# Altium PCB HAT PCB.PcbDoc
Units mm, origin at the board's own origin, x right, y up, seen from the top; angles counter-clockwise.
Board outline 100.25 x 60.26 mm, 2 copper layers (Top Layer, Bottom Layer); 17 components, 36 nets, 670 pads, 34 vias.
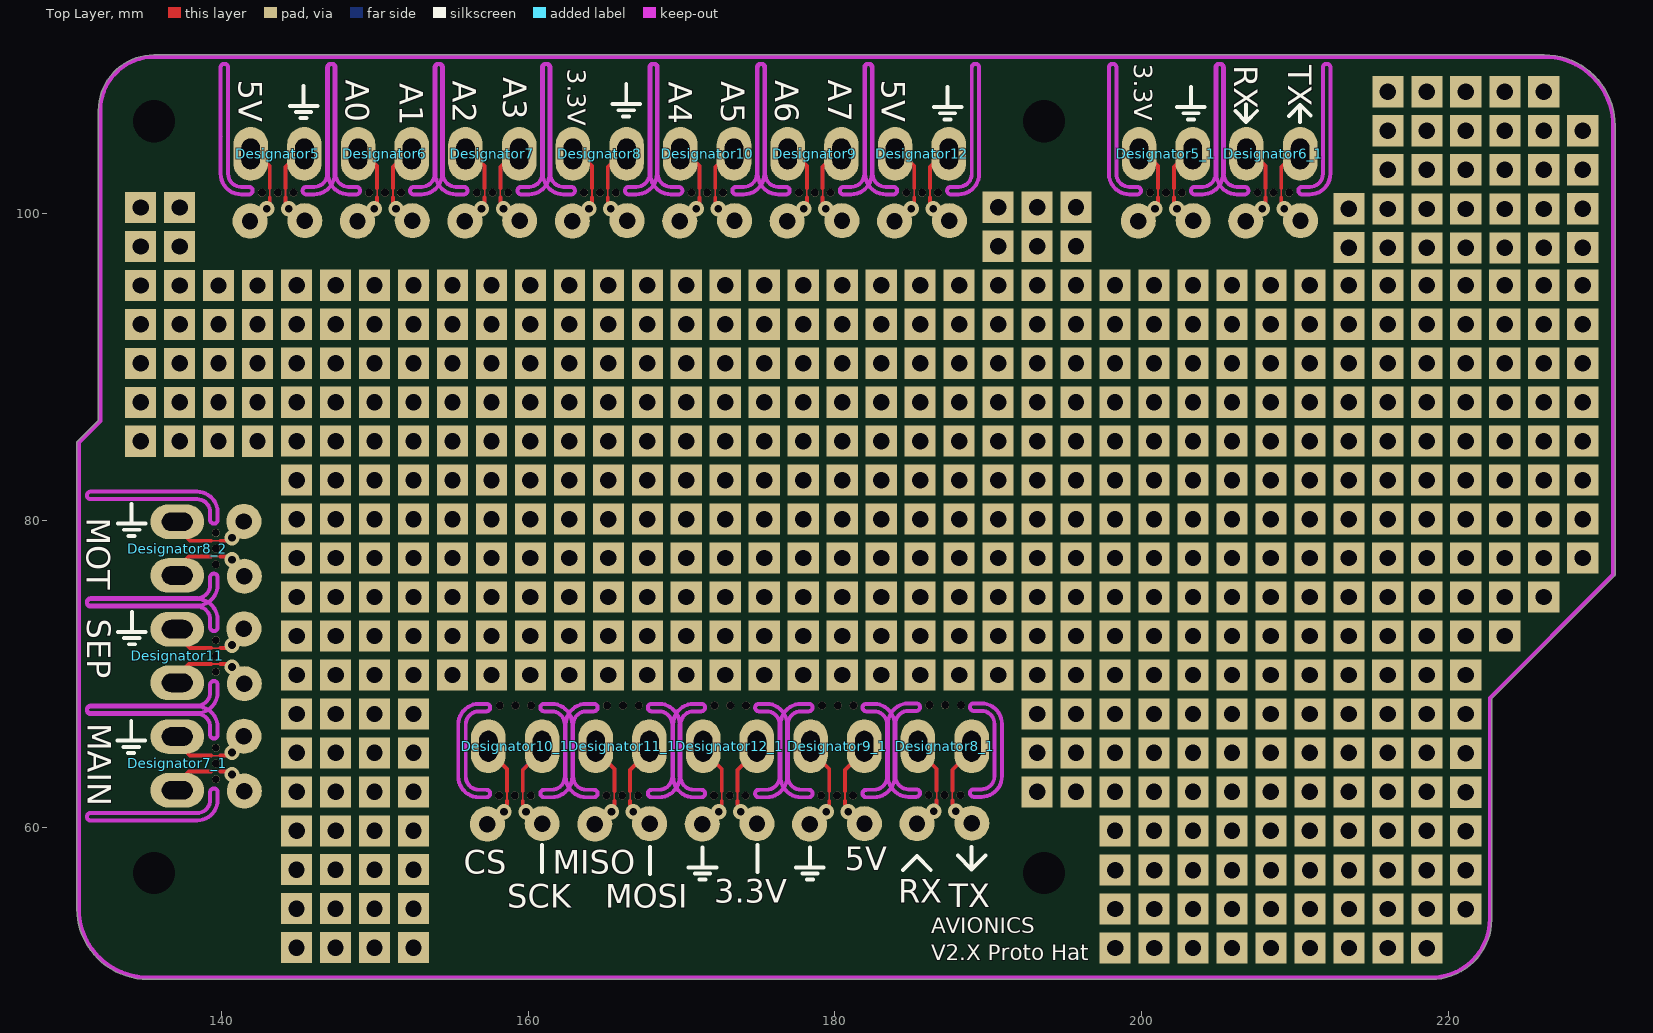
[diagram p0: Top Layer view]
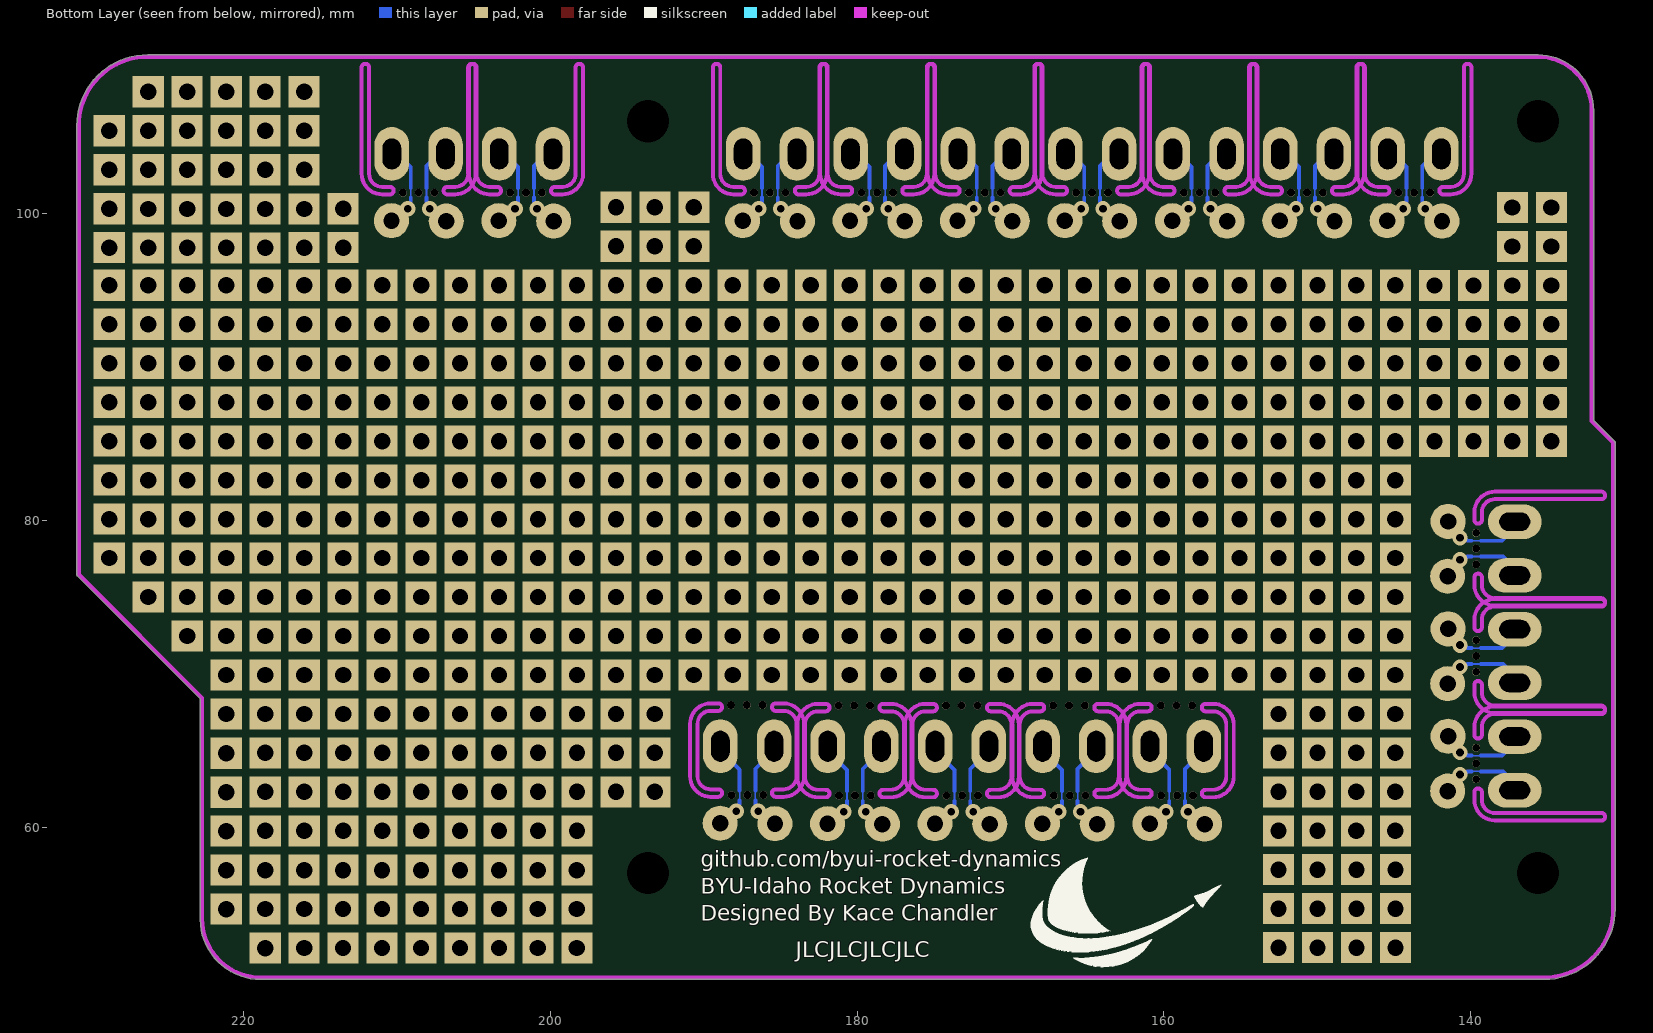
[diagram p1: Bottom Layer view, seen from below]

## Layer stack, top to bottom
Top Solder: solder mask 0.0102, Solder Resist, Dk 3.5
Top Layer: signal copper 0.0356
Dielectric 1: dielectric 0.32, FR-4, Dk 4.8
Bottom Layer: signal copper 0.0356
Bottom Solder: solder mask 0.0102, Solder Resist, Dk 3.5

## Board outline
135.216,50.08 ccw(c135.217,50.207) 135.217,50.08 218.813,50.08 ccw(c218.851,50.201) 218.851,50.074 ccw(c218.851,54.03) 222.806,53.968 ccw(c222.685,54.007) 222.812,54.007 222.812,68.384 230.805,76.377 230.804,76.376 ccw(c230.715,76.467) 230.842,76.467 230.842,105.683 ccw(c230.717,105.707) 230.844,105.707 ccw(c226.217,105.707) 226.217,110.335 ccw(c226.217,110.207) 226.21,110.334 135.618,110.335 135.617,110.335 cw(c135.617,110.207) 135.618,110.335 135.617,110.335 ccw(c135.617,106.707) 131.99,106.707 131.99,86.51 130.627,85.147 130.627,85.148 ccw(c130.717,85.057) 130.59,85.057 130.59,54.707 ccw(c130.717,54.707) 130.59,54.7 ccw(c135.217,54.707)
cut-out: 135.817,81.839
cut-out: 140.103,105.042

## Design rules (kind name [scope] priority, off if disabled: settings)
BoardOutlineClearance [All] p1: gap=0.2 ignorepadtopadclearanceinfootprint=FALSE except(0.4: Arc-SplitBarrior Arc-SplitContinuation Track-SplitBarrior Track-SplitContinuation SMDPad-SplitBarrior SMDPad-SplitContinuation THPad-SplitBarrior THPad-SplitContinuation Via-SplitBarrior Via-SplitContinuation Fill-SplitBarrior Fill-SplitContinuation Poly-SplitBarrior Poly-SplitContinuation Region-SplitBarrior Region-SplitContinuation Text-SplitBarrior Text-SplitContinuation)
Clearance "Clearance Bottom Layer" [OnLayer('Bottom Layer')] p1: gap=0.203 ignorepadtopadclearanceinfootprint=TRUE except(0.254: Arc-Text Track-Text SMDPad-Text THPad-Text Via-Text Fill-Text Poly-Text Region-Text Text-Text)
Clearance "Clearance Top Layer" [OnLayer('Top Layer')] p2: gap=0.203 ignorepadtopadclearanceinfootprint=TRUE except(0.254: Arc-Text Track-Text SMDPad-Text THPad-Text Via-Text Fill-Text Poly-Text Region-Text Text-Text)
Clearance [All] p3: gap=0.2 ignorepadtopadclearanceinfootprint=FALSE except(0.089: Arc-Arc Arc-Track Arc-SMDPad Track-Track Track-SMDPad SMDPad-SMDPad; 0.127: Arc-Via Track-Via SMDPad-Via THPad-Via Via-Via; 0.254: Arc-Text Track-Text SMDPad-Text THPad-Text Via-Text Fill-Text Poly-Text Region-Text Text-Text)
ComponentClearance [HasFootprint('Screw Terminal') vs HasFootprint('Screw Terminal')] p1: gap=0 collisioncheckmode=3 verticalgap=0 showdistances=FALSE
ComponentClearance ComponentClearance_2 [InComponent('No Component') And OnLayer('Top Layer')] p2: gap=0.254 collisioncheckmode=3 verticalgap=0.254 showdistances=FALSE
ComponentClearance ComponentClearance_1 [All] p3: gap=0.254 collisioncheckmode=3 verticalgap=0.254 showdistances=FALSE
HoleSize [All] p1: absolutevalues=TRUE maxlimit=6.3 minlimit=0.2 maxpercent=80.000 minpercent=20.000
MinimumAnnularRing [All] p1: minimumring=0.076
MinimumSolderMaskSliver [All] p1: minsoldermaskwidth=0.1
PolygonConnect PolygonConnect_1 [All] p1: thpad.connectstyle=Relief thpad.reliefconductorwidth=0.508 thpad.reliefentries=4 thpad.polygonreliefangle="90 Angle" thpad.airgapwidth=0.254 smdpad.connectstyle=Relief smdpad.reliefconductorwidth=0.508 smdpad.reliefentries=4 smdpad.polygonreliefangle="90 Angle" smdpad.airgapwidth=0.254 via.connectstyle=Direct via.reliefconductorwidth=0.508 via.reliefentries=4 via.polygonreliefangle="90 Angle" via.airgapwidth=0.254
RoutingCorners [All] p1: cornerstyle=Round minsetback=2.54 maxsetback=2.54
RoutingVias [All] p1: holewidth=0.5 width=1 viastyle="Through Hole" minholewidth=0.2 minwidth=0.45 maxholewidth=1 maxwidth=2
SilkToSilkClearance [All] p1: silktosilkclearance=0.1
SilkToSolderMaskClearance [IsPad] p1: minsilkscreentomaskgap=0.1 clearancetoexposedcopper=TRUE
SolderMaskExpansion [IsVia] p1: expansion=0 soldermaskfromhole=TRUE
Width [All] p1: maxlimit=10 minlimit=0.089 preferedwidth=0.381
24 further rules are at their usual default settings.

## Components (designator, comment, footprint, x,y, rotation, side; value= is the part's Value field where it differs from the comment)
Designator5 "Comment" "SCREW TERMINAL - DUPLICATE" 145.417,103.88 r90 top
Designator5_1 "Comment" "SCREW TERMINAL - DUPLICATE" 203.317,103.88 r90 top
Designator6 "Comment" "SCREW TERMINAL - DUPLICATE" 152.417,103.88 r90 top
Designator6_1 "Comment" "SCREW TERMINAL - DUPLICATE" 210.317,103.88 r90 top
Designator7 "Comment" "SCREW TERMINAL - DUPLICATE" 159.417,103.88 r90 top
Designator7_1 "Comment" "SCREW TERMINAL - DUPLICATE" 137.131,65.907 r180 top
Designator8 "Comment" "SCREW TERMINAL - DUPLICATE" 166.417,103.88 r90 top
Designator8_1 "Comment" "SCREW TERMINAL - DUPLICATE" 185.406,65.274 r270 top
Designator8_2 "Comment" "SCREW TERMINAL - DUPLICATE" 137.131,79.907 r180 top
Designator9 "Comment" "SCREW TERMINAL - DUPLICATE" 180.417,103.88 r90 top
Designator9_1 "Comment" "SCREW TERMINAL - DUPLICATE" 178.406,65.274 r270 top
Designator10 "Comment" "SCREW TERMINAL - DUPLICATE" 173.417,103.88 r90 top
Designator10_1 "Comment" "SCREW TERMINAL - DUPLICATE" 157.406,65.274 r270 top
Designator11 "Comment" "SCREW TERMINAL - DUPLICATE" 137.131,72.907 r180 top
Designator11_1 "Comment" "SCREW TERMINAL - DUPLICATE" 164.406,65.274 r270 top
Designator12 "Comment" "SCREW TERMINAL - DUPLICATE" 187.417,103.88 r90 top
Designator12_1 "Comment" "SCREW TERMINAL - DUPLICATE" 171.406,65.274 r270 top

## Footprints (in the part's own frame and the unit in brackets; to place one, negate y for a bottom-side part, rotate by r counter-clockwise, add the part's x,y. Pads: shape width x height; smd on the part's side, far side on the other; paste and mask are expansions set on the pad)
"SCREW TERMINAL - DUPLICATE" [mm] "Non-Polarized"
  oval 3.5x2.25 hole 1.2 slot 2 at 0 deg: 1(0,3.5) 2(0,0)
  body extent -1.35,2.55 1.3,4.45, height 7.01

## Free pads (board coordinates)
  round 0.508 hole 0.508 unplated: 0(139.646,63.124) 0(139.646,64.153) 0(139.646,65.181) 0(139.646,70.125) 0(139.646,71.154) 0(139.646,72.182) 0(139.646,77.126) 0(139.646,78.154) 0(139.646,79.183) 0(142.648,101.356) 0(143.677,101.356) 0(144.706,101.356) 0(149.649,101.356) 0(150.678,101.356) 0(151.706,101.356) 0(156.65,101.356) 0(157.679,101.356) 0(158.105,62.065) 0(158.15,67.926) 0(158.707,101.356) 0(159.134,62.065) 0(159.178,67.926) 0(160.173,62.056) 0(160.207,67.926) 0(163.651,101.356) 0(164.679,101.356) 0(165.106,62.065) 0(165.151,67.926) 0(165.708,101.356) 0(166.135,62.065) 0(166.179,67.926) 0(167.174,62.056) 0(167.208,67.926) 0(170.652,101.356) 0(171.68,101.356) 0(172.107,62.065) 0(172.152,67.926) 0(172.709,101.356) 0(173.136,62.065) 0(173.18,67.926) 0(174.175,62.056) 0(174.209,67.926) 0(177.653,101.356) 0(178.681,101.356) 0(179.108,62.065) 0(179.152,67.926) 0(179.71,101.356) 0(180.137,62.065) 0(180.181,67.926) 0(181.176,62.056) 0(181.21,67.926) 0(184.653,101.356) 0(185.682,101.356) 0(186.109,62.093) 0(186.153,67.954) 0(186.711,101.356) 0(187.138,62.093) 0(187.182,67.954) 0(188.177,62.085) 0(188.211,67.954) 0(200.541,101.356) 0(201.57,101.356) 0(202.599,101.356) 0(207.542,101.356) 0(208.571,101.356) 0(209.599,101.356)
  round 1.524 hole 2.75 unplated mask+2.25: 41(135.617,57.007) 41(193.617,57.007) 41(193.617,106.007)
  oval 1.5x1.524 hole 2.75 unplated mask+2.25: 41(135.617,106.007)
  rect 2.032x2.032 hole 1.067 mask+0.102: 42(134.744,85.147) 42(134.744,87.687) 42(134.744,90.227) 42(134.744,92.767) 42(134.744,95.307) 42(134.744,97.847) 42(134.744,100.387) 42(137.284,85.147) 42(137.284,87.687) 42(137.284,90.227) 42(137.284,92.767) 42(137.284,95.307) 42(137.284,97.847) 42(137.284,100.387) 42(139.824,85.147) 42(139.824,87.687) 42(139.824,90.227) 42(139.824,92.767) 42(139.824,95.307) 42(142.364,85.147) 42(142.364,87.687) 42(142.364,90.227) 42(142.364,92.767) 42(142.364,95.307) 42(144.907,52.153) 42(144.907,54.693) 42(144.907,57.233) 42(144.91,59.76) 42(144.91,62.3) 42(144.91,64.84) 42(144.91,67.38) 42(144.91,69.92) 42(144.91,72.46) 42(144.91,75) 42(144.91,77.54) 42(144.91,80.08) 42(144.91,82.62) 42(144.91,85.16) 42(144.91,87.7) 42(144.91,90.24) 42(144.91,92.78) 42(144.91,95.32) 42(147.447,52.153) 42(147.447,54.693) 42(147.447,57.233) 42(147.45,59.76) 42(147.45,62.3) 42(147.45,64.84) 42(147.45,67.38) 42(147.45,69.92) 42(147.45,72.46) 42(147.45,75) 42(147.45,77.54) 42(147.45,80.08) 42(147.45,82.62) 42(147.45,85.16) 42(147.45,87.7) 42(147.45,90.24) 42(147.45,92.78) 42(147.45,95.32) 42(149.987,52.153) 42(149.987,54.693) 42(149.987,57.233) 42(149.99,59.76) 42(149.99,62.3) 42(149.99,64.84) 42(149.99,67.38) 42(149.99,69.92) 42(149.99,72.46) 42(149.99,75) 42(149.99,77.54) 42(149.99,80.08) 42(149.99,82.62) 42(149.99,85.16) 42(149.99,87.7) 42(149.99,90.24) 42(149.99,92.78) 42(149.99,95.32) 42(152.527,52.153) 42(152.527,54.693) 42(152.527,57.233) 42(152.53,59.76) 42(152.53,62.3) 42(152.53,64.84) 42(152.53,67.38) 42(152.53,69.92) 42(152.53,72.46) 42(152.53,75) 42(152.53,77.54) 42(152.53,80.08) 42(152.53,82.62) 42(152.53,85.16) 42(152.53,87.7) 42(152.53,90.24) 42(152.53,92.78) 42(152.53,95.32) 42(155.07,69.92) 42(155.07,72.46) 42(155.07,75) 42(155.07,77.54) 42(155.07,80.08) 42(155.07,82.62) 42(155.07,85.16) 42(155.07,87.7) 42(155.07,90.24) 42(155.07,92.78) 42(155.07,95.32) 42(157.61,69.92) 42(157.61,72.46) 42(157.61,75) 42(157.61,77.54) 42(157.61,80.08) 42(157.61,82.62) 42(157.61,85.16) 42(157.61,87.7) 42(157.61,90.24) 42(157.61,92.78) 42(157.61,95.32) 42(160.15,69.92) 42(160.15,72.46) 42(160.15,75) 42(160.15,77.54) 42(160.15,80.08) 42(160.15,82.62) 42(160.15,85.16) 42(160.15,87.7) 42(160.15,90.24) 42(160.15,92.78) 42(160.15,95.32) 42(162.69,69.92) 42(162.69,72.46) 42(162.69,75) 42(162.69,77.54) 42(162.69,80.08) 42(162.69,82.62) 42(162.69,85.16) 42(162.69,87.7) 42(162.69,90.24) 42(162.69,92.78) 42(162.69,95.32) 42(165.23,69.92) 42(165.23,72.46) 42(165.23,75) 42(165.23,77.54) 42(165.23,80.08) 42(165.23,82.62) 42(165.23,85.16) 42(165.23,87.7) 42(165.23,90.24) 42(165.23,92.78) 42(165.23,95.32) 42(167.77,69.92) 42(167.77,72.46) 42(167.77,75) 42(167.77,77.54) 42(167.77,80.08) 42(167.77,82.62) 42(167.77,85.16) 42(167.77,87.7) 42(167.77,90.24) 42(167.77,92.78) 42(167.77,95.32) 42(170.31,69.92) 42(170.31,72.46) 42(170.31,75) 42(170.31,77.54) 42(170.31,80.08) 42(170.31,82.62) 42(170.31,85.16) 42(170.31,87.7) 42(170.31,90.24) 42(170.31,92.78) 42(170.31,95.32) 42(172.85,69.92) 42(172.85,72.46) 42(172.85,75) 42(172.85,77.54) 42(172.85,80.08) 42(172.85,82.62) 42(172.85,85.16) 42(172.85,87.7) 42(172.85,90.24) 42(172.85,92.78) 42(172.85,95.32) 42(175.39,69.92) 42(175.39,72.46) 42(175.39,75) 42(175.39,77.54) 42(175.39,80.08) 42(175.39,82.62) 42(175.39,85.16) 42(175.39,87.7) 42(175.39,90.24) 42(175.39,92.78) 42(175.39,95.32) 42(177.93,69.92) 42(177.93,72.46) 42(177.93,75) 42(177.93,77.54) 42(177.93,80.08) 42(177.93,82.62) 42(177.93,85.16) 42(177.93,87.7) 42(177.93,90.24) 42(177.93,92.78) 42(177.93,95.32) 42(180.47,69.92) 42(180.47,72.46) 42(180.47,75) 42(180.47,77.54) 42(180.47,80.08) 42(180.47,82.62) 42(180.47,85.16) 42(180.47,87.7) 42(180.47,90.24) 42(180.47,92.78) 42(180.47,95.32) 42(183.01,69.92) 42(183.01,72.46) 42(183.01,75) 42(183.01,77.54) 42(183.01,80.08) 42(183.01,82.62) 42(183.01,85.16) 42(183.01,87.7) 42(183.01,90.24) 42(183.01,92.78) 42(183.01,95.32) 42(185.55,69.92) 42(185.55,72.46) 42(185.55,75) 42(185.55,77.54) 42(185.55,80.08) 42(185.55,82.62) 42(185.55,85.16) 42(185.55,87.7) 42(185.55,90.24) 42(185.55,92.78) 42(185.55,95.32) 42(188.09,69.92) 42(188.09,72.46) 42(188.09,75) 42(188.09,77.54) 42(188.09,80.08) 42(188.09,82.62) 42(188.09,85.16) 42(188.09,87.7) 42(188.09,90.24) 42(188.09,92.78) 42(188.09,95.32) 42(190.63,69.92) 42(190.63,72.46) 42(190.63,75) 42(190.63,77.54) 42(190.63,80.08) 42(190.63,82.62) 42(190.63,85.16) 42(190.63,87.7) 42(190.63,90.24) 42(190.63,92.78) 42(190.63,95.32) 42(190.63,97.86) 42(190.63,100.4) 42(193.17,62.3) 42(193.17,64.84) 42(193.17,67.38) 42(193.17,69.92) 42(193.17,72.46) 42(193.17,75) 42(193.17,77.54) 42(193.17,80.08) 42(193.17,82.62) 42(193.17,85.16) 42(193.17,87.7) 42(193.17,90.24) 42(193.17,92.78) 42(193.17,95.32) 42(193.17,97.86) 42(193.17,100.4) 42(195.71,62.3) 42(195.71,64.84) 42(195.71,67.38) 42(195.71,69.92) 42(195.71,72.46) 42(195.71,75) 42(195.71,77.54) 42(195.71,80.08) 42(195.71,82.62) 42(195.71,85.16) 42(195.71,87.7) 42(195.71,90.24) 42(195.71,92.78) 42(195.71,95.32) 42(195.71,97.86) 42(195.71,100.4) 42(198.25,59.76) 42(198.25,62.3) 42(198.25,64.84) 42(198.25,67.38) 42(198.25,69.92) 42(198.25,72.46) 42(198.25,75) 42(198.25,77.54) 42(198.25,80.08) 42(198.25,82.62) 42(198.25,85.16) 42(198.25,87.7) 42(198.25,90.24) 42(198.25,92.78) 42(198.25,95.32) 42(198.257,52.124) 42(198.257,54.664) 42(198.257,57.204) 42(200.79,59.76) 42(200.79,62.3) 42(200.79,64.84) 42(200.79,67.38) 42(200.79,69.92) 42(200.79,72.46) 42(200.79,75) 42(200.79,77.54) 42(200.79,80.08) 42(200.79,82.62) 42(200.79,85.16) 42(200.79,87.7) 42(200.79,90.24) 42(200.79,92.78) 42(200.79,95.32) 42(200.797,52.124) 42(200.797,54.664) 42(200.797,57.204) 42(203.33,59.76) 42(203.33,62.3) 42(203.33,64.84) 42(203.33,67.38) 42(203.33,69.92) 42(203.33,72.46) 42(203.33,75) 42(203.33,77.54) 42(203.33,80.08) 42(203.33,82.62) 42(203.33,85.16) 42(203.33,87.7) 42(203.33,90.24) 42(203.33,92.78) 42(203.33,95.32) 42(203.337,52.124) 42(203.337,54.664) 42(203.337,57.204) 42(205.87,59.76) 42(205.87,62.3) 42(205.87,64.84) 42(205.87,67.38) 42(205.87,69.92) 42(205.87,72.46) 42(205.87,75) 42(205.87,77.54) 42(205.87,80.08) 42(205.87,82.62) 42(205.87,85.16) 42(205.87,87.7) 42(205.87,90.24) 42(205.87,92.78) 42(205.87,95.32) 42(205.877,52.124) 42(205.877,54.664) 42(205.877,57.204) 42(208.41,59.76) 42(208.41,62.3) 42(208.41,64.84) 42(208.41,67.38) 42(208.41,69.92) 42(208.41,72.46) 42(208.41,75) 42(208.41,77.54) 42(208.41,80.08) 42(208.41,82.62) 42(208.41,85.16) 42(208.41,87.7) 42(208.41,90.24) 42(208.41,92.78) 42(208.41,95.32) 42(208.417,52.124) 42(208.417,54.664) 42(208.417,57.204) 42(210.95,59.76) 42(210.95,62.3) 42(210.95,64.84) 42(210.95,67.38) 42(210.95,69.92) 42(210.95,72.46) 42(210.95,75) 42(210.95,77.54) 42(210.95,80.08) 42(210.95,82.62) 42(210.95,85.16) 42(210.95,87.7) 42(210.95,90.24) 42(210.95,92.78) 42(210.95,95.32) 42(210.957,52.124) 42(210.957,54.664) 42(210.957,57.204) 42(213.49,59.76) 42(213.49,62.3) 42(213.49,64.84) 42(213.49,67.38) 42(213.49,69.92) 42(213.49,72.46) 42(213.49,75) 42(213.49,77.54) 42(213.49,80.08) 42(213.49,82.62) 42(213.49,85.16) 42(213.49,87.7) 42(213.49,90.24) 42(213.49,92.78) 42(213.49,95.32) 42(213.493,97.771) 42(213.493,100.311) 42(213.497,52.124) 42(213.497,54.664) 42(213.497,57.204) 42(216.03,59.76) 42(216.03,62.3) 42(216.03,64.84) 42(216.03,67.38) 42(216.03,69.92) 42(216.03,72.46) 42(216.03,75) 42(216.03,77.54) 42(216.03,80.08) 42(216.03,82.62) 42(216.03,85.16) 42(216.03,87.7) 42(216.03,90.24) 42(216.03,92.78) 42(216.03,95.32) 42(216.033,97.771) 42(216.033,100.292) 42(216.033,102.851) 42(216.033,105.391) 42(216.033,107.931) 42(216.037,52.124) 42(216.037,54.664) 42(216.037,57.204) 42(218.57,52.121) 42(218.57,59.76) 42(218.57,62.3) 42(218.57,64.84) 42(218.57,67.38) 42(218.57,69.92) 42(218.57,72.46) 42(218.57,75) 42(218.57,77.54) 42(218.57,80.08) 42(218.57,82.62) 42(218.57,85.16) 42(218.57,87.7) 42(218.57,90.24) 42(218.57,92.78) 42(218.57,95.32) 42(218.573,97.752) 42(218.573,100.292) 42(218.573,102.851) 42(218.573,105.391) 42(218.573,107.931) 42(218.577,54.664) 42(218.577,57.204) 42(221.113,54.661) 42(221.113,57.201) 42(221.113,59.741) 42(221.113,62.281) 42(221.113,64.821) 42(221.113,67.38) 42(221.113,69.92) 42(221.113,72.46) 42(221.113,75) 42(221.113,77.54) 42(221.113,80.08) 42(221.113,82.62) 42(221.113,85.16) 42(221.113,87.7) 42(221.113,90.24) 42(221.113,92.78) 42(221.113,95.32) 42(221.113,97.752) 42(221.113,100.292) 42(221.113,102.851) 42(221.113,105.391) 42(221.113,107.931) 42(223.653,72.46) 42(223.653,75) 42(223.653,77.54) 42(223.653,80.08) 42(223.653,82.62) 42(223.653,85.16) 42(223.653,87.7) 42(223.653,90.24) 42(223.653,92.78) 42(223.653,95.32) 42(223.657,97.752) 42(223.657,100.292) 42(223.657,102.851) 42(223.657,105.391) 42(223.657,107.931) 42(226.193,75) 42(226.193,77.54) 42(226.193,80.08) 42(226.193,82.62) 42(226.193,85.16) 42(226.193,87.7) 42(226.193,90.24) 42(226.193,92.78) 42(226.193,95.32) 42(226.197,97.752) 42(226.197,100.292) 42(226.197,102.851) 42(226.197,105.391) 42(226.197,107.931) 42(228.733,77.54) 42(228.733,80.08) 42(228.733,82.62) 42(228.733,85.16) 42(228.733,87.7) 42(228.733,90.24) 42(228.733,92.78) 42(228.733,95.32) 42(228.737,97.771) 42(228.737,100.311) 42(228.737,102.851) 42(228.737,105.391)
  round 2.286 hole 1.067: 42(141.475,65.924) 42(141.475,72.925) 42(141.475,79.926) 42(141.503,62.352) 42(141.503,69.353) 42(141.503,76.354) 42(141.877,99.498) 42(145.449,99.527) 42(148.878,99.498) 42(152.449,99.527) 42(155.878,99.498) 42(157.344,60.199) 42(159.45,99.527) 42(160.916,60.228) 42(162.879,99.498) 42(164.345,60.199) 42(166.451,99.527) 42(167.917,60.228) 42(169.88,99.498) 42(171.346,60.199) 42(173.452,99.527) 42(174.918,60.228) 42(176.881,99.498) 42(178.347,60.199) 42(180.453,99.527) 42(181.919,60.228) 42(183.882,99.498) 42(185.348,60.228) 42(187.454,99.527) 42(188.92,60.256) 42(199.77,99.498) 42(203.341,99.527) 42(206.77,99.498) 42(210.342,99.527)

## Via types
v1: diameter 1, hole 0.5, Top Layer to Bottom Layer, 34 vias

## Nets (pads, with @x,y where several pads share a name; then routed paths per layer and width w, separated by ;. In a path a pad name is that pad's centre, name@x,y a point inside that pad or via, vN(x,y) a via of type N, cw(c..) or ccw(c..) an arc to the next point about the centre after c; other vN are vias at no path point)
NewNet1: 
NewNet2: 
NewNet3: 
NewNet4: 
NewNet5: 
NewNet6: 
NewNet7: 
NewNet8: 
NewNet9: 
NewNet10: 
NewNet11: 
NewNet12: 
NewNet13: 
NewNet14: 
NewNet15: 
NewNet16: 
NewNet17: 
NewNet18: 
NewNet19: 
NewNet20: 
NewNet21: 
NewNet22: 
NewNet23: 
NewNet24: 
NewNet25: 
NewNet26: 
NewNet27: 
NewNet28: 
NewNet29: 
NewNet30: 
NewNet31: 
NewNet32: 
NewNet33: 
NewNet34: 
NewNet35: 
NewNet36: 
pads on no net: Designator5.1 Designator5.2 Designator5_1.1 Designator5_1.2 Designator6.1 Designator6.2 Designator6_1.1 Designator6_1.2 Designator7.1 Designator7.2 Designator7_1.1 Designator7_1.2 Designator8.1 Designator8.2 Designator8_1.1 Designator8_1.2 Designator8_2.1 Designator8_2.2 Designator9.1 Designator9.2 Designator9_1.1 Designator9_1.2 Designator10.1 Designator10.2 Designator10_1.1 Designator10_1.2 Designator11.1 Designator11.2 Designator11_1.1 Designator11_1.2 Designator12.1 Designator12.2 Designator12_1.1 Designator12_1.2
copper on no net: | length 364.5
  Top Layer w0.108: 139.332,63.637 139.932,63.637 ; 139.332,64.665 139.932,64.665 ; 139.332,70.637 139.932,70.637 ; 139.332,71.666 139.932,71.666 ; 139.332,77.638 139.932,77.638 ; 139.332,78.667 139.932,78.667 ; 143.161,101.07 143.161,101.67 ; 144.189,101.07 144.189,101.67 ; 150.162,101.07 150.162,101.67 ; 151.19,101.07 151.19,101.67 ; 157.162,101.07 157.162,101.67 ; 158.191,101.07 158.191,101.67 ; 158.62,61.751 158.62,62.351 ; 159.649,61.722 159.649,61.751 159.649,62.351 ; 164.163,101.07 164.163,101.67 ; 165.192,101.07 165.192,101.67 ; 165.621,61.751 165.621,62.351 ; 166.649,61.722 166.649,61.751 166.649,62.351 ; 171.164,101.07 171.164,101.67 ; 172.193,101.07 172.193,101.67 ; 172.622,61.751 172.622,62.351 ; 173.65,61.722 173.65,61.751 173.65,62.351 ; 178.165,101.07 178.165,101.67 ; 179.194,101.07 179.194,101.67 ; 179.622,61.751 179.622,62.351 ; 180.651,61.722 180.651,61.751 180.651,62.351 ; 185.166,101.07 185.166,101.67 ; 186.195,101.07 186.195,101.67 ; 186.623,61.779 186.623,62.379 ; 187.652,61.751 187.652,61.779 187.652,62.379 ; 201.054,101.07 201.054,101.67 ; 202.082,101.07 202.082,101.67 ; 208.055,101.07 208.055,101.67 ; 209.083,101.07 209.083,101.67
  Top Layer w0.254: 136.703,62.436 137.903,63.637 139.332,63.637 ; 136.703,69.437 137.903,70.637 139.332,70.637 ; 136.703,76.438 137.903,77.638 139.332,77.638 ; 136.711,65.92 137.966,64.665 139.332,64.665 ; 136.711,72.92 137.966,71.666 139.332,71.666 ; 136.711,79.921 137.966,78.667 139.332,78.667 ; 139.96,63.637 140.218,63.637 140.475,63.637 v1@140.675,63.436 ; 139.96,64.665 140.216,64.665 140.36,64.665 v1@140.589,64.894 ; 139.96,70.637 140.218,70.637 140.475,70.637 v1@140.675,70.437 ; 139.96,71.666 140.216,71.666 140.36,71.666 v1@140.589,71.895 ; 139.96,77.638 140.218,77.638 140.475,77.638 v1@140.675,77.438 ; 139.96,78.667 140.216,78.667 140.36,78.667 v1@140.589,78.896 ; 141.961,104.299 143.161,103.099 143.161,101.67 ; v1@142.961,100.327 143.161,100.527 143.161,100.784 143.161,101.041 ; 144.189,101.041 144.189,100.786 144.189,100.641 v1@144.418,100.413 ; 144.189,101.67 144.189,103.036 145.444,104.29 ; 148.961,104.299 150.162,103.099 150.162,101.67 ; v1@149.962,100.327 150.162,100.527 150.162,100.784 150.162,101.041 ; 151.19,101.041 151.19,100.786 151.19,100.641 v1@151.419,100.413 ; 151.19,101.67 151.19,103.036 152.445,104.29 ; 155.962,104.299 157.162,103.099 157.162,101.67 ; v1@156.962,100.327 157.162,100.527 157.162,100.784 157.162,101.041 ; 157.334,60.179 158.62,61.465 158.62,61.722 ; 157.42,64.98 158.62,63.779 158.62,62.351 ; 158.191,101.041 158.191,100.786 158.191,100.641 v1@158.42,100.413 ; 158.191,101.67 158.191,103.036 159.446,104.29 ; 159.649,61.722 159.649,61.467 160.908,60.208 ; 159.649,62.351 159.649,63.716 160.903,64.971 ; 162.963,104.299 164.163,103.099 164.163,101.67 ; v1@163.963,100.327 164.163,100.527 164.163,100.784 164.163,101.041 ; 164.335,60.179 165.621,61.465 165.621,61.722 ; 164.421,64.98 165.621,63.779 165.621,62.351 ; 165.192,101.041 165.192,100.786 165.192,100.641 v1@165.421,100.413 ; 165.192,101.67 165.192,103.036 166.446,104.29 ; 166.649,61.722 166.649,61.467 167.908,60.208 ; 166.649,62.351 166.649,63.716 167.904,64.971 ; 169.964,104.299 171.164,103.099 171.164,101.67 ; v1@170.964,100.327 171.164,100.527 171.164,100.784 171.164,101.041 ; 171.336,60.179 172.622,61.465 172.622,61.722 ; 171.421,64.98 172.622,63.779 172.622,62.351 ; 172.193,101.041 172.193,100.786 172.193,100.641 v1@172.422,100.413 ; 172.193,101.67 172.193,103.036 173.447,104.29 ; 173.65,61.722 173.65,61.467 174.909,60.208 ; 173.65,62.351 173.65,63.716 174.905,64.971 ; 176.965,104.299 178.165,103.099 178.165,101.67 ; v1@177.965,100.327 178.165,100.527 178.165,100.784 178.165,101.041 ; 178.337,60.179 179.622,61.465 179.622,61.722 ; 178.422,64.98 179.622,63.779 179.622,62.351 ; 179.194,101.041 179.194,100.786 179.194,100.641 v1@179.422,100.413 ; 179.194,101.67 179.194,103.036 180.448,104.29 ; 180.651,61.722 180.651,61.467 181.91,60.208 ; 180.651,62.351 180.651,63.716 181.906,64.971 ; 183.966,104.299 185.166,103.099 185.166,101.67 ; v1@184.966,100.327 185.166,100.527 185.166,100.784 185.166,101.041 ; 185.337,60.208 186.623,61.493 186.623,61.751 ; 185.423,65.008 186.623,63.808 186.623,62.379 ; 186.195,101.041 186.195,100.786 186.195,100.641 v1@186.423,100.413 ; 186.195,101.67 186.195,103.036 187.449,104.29 ; 187.652,61.751 187.652,61.495 188.911,60.236 ; 187.652,62.379 187.652,63.745 188.906,64.999 ; 199.854,104.299 201.054,103.099 201.054,101.67 ; v1@200.854,100.327 201.054,100.527 201.054,100.784 201.054,101.041 ; 202.082,101.041 202.082,100.786 202.082,100.641 v1@202.311,100.413 ; 202.082,101.67 202.082,103.036 203.337,104.29 ; 206.854,104.299 208.055,103.099 208.055,101.67 ; v1@207.855,100.327 208.055,100.527 208.055,100.784 208.055,101.041 ; 209.083,101.041 209.083,100.786 209.083,100.641 v1@209.312,100.413 ; 209.083,101.67 209.083,103.036 210.338,104.29
  Bottom Layer w0.108: 139.332,63.637 139.932,63.637 ; 139.332,64.665 139.932,64.665 ; 139.332,70.637 139.932,70.637 ; 139.332,71.666 139.932,71.666 ; 139.332,77.638 139.932,77.638 ; 139.332,78.667 139.932,78.667 ; 143.161,101.07 143.161,101.67 ; 144.189,101.07 144.189,101.67 ; 150.162,101.07 150.162,101.67 ; 151.19,101.07 151.19,101.67 ; 157.162,101.07 157.162,101.67 ; 158.191,101.07 158.191,101.67 ; 158.62,61.751 158.62,62.351 ; 159.649,61.722 159.649,61.751 159.649,62.351 ; 164.163,101.07 164.163,101.67 ; 165.192,101.07 165.192,101.67 ; 165.621,61.751 165.621,62.351 ; 166.649,61.722 166.649,61.751 166.649,62.351 ; 171.164,101.07 171.164,101.67 ; 172.193,101.07 172.193,101.67 ; 172.622,61.751 172.622,62.351 ; 173.65,61.722 173.65,61.751 173.65,62.351 ; 178.165,101.07 178.165,101.67 ; 179.194,101.07 179.194,101.67 ; 179.622,61.751 179.622,62.351 ; 180.651,61.722 180.651,61.751 180.651,62.351 ; 185.166,101.07 185.166,101.67 ; 186.195,101.07 186.195,101.67 ; 186.623,61.779 186.623,62.379 ; 187.652,61.751 187.652,61.779 187.652,62.379 ; 201.054,101.07 201.054,101.67 ; 202.082,101.07 202.082,101.67 ; 208.055,101.07 208.055,101.67 ; 209.083,101.07 209.083,101.67
  Bottom Layer w0.254: 136.703,62.436 137.903,63.637 139.332,63.637 ; 136.703,69.437 137.903,70.637 139.332,70.637 ; 136.703,76.438 137.903,77.638 139.332,77.638 ; 136.711,65.92 137.966,64.665 139.332,64.665 ; 136.711,72.92 137.966,71.666 139.332,71.666 ; 136.711,79.921 137.966,78.667 139.332,78.667 ; 139.96,63.637 140.218,63.637 v1@140.56,63.295 ; 139.96,64.665 140.216,64.665 141.475,65.924 ; 139.96,70.637 140.218,70.637 v1@140.56,70.295 ; 139.96,71.666 140.216,71.666 141.475,72.925 ; 139.96,77.638 140.218,77.638 v1@140.56,77.296 ; 139.96,78.667 140.216,78.667 141.475,79.926 ; 141.961,104.299 143.161,103.099 143.161,101.67 ; v1@142.819,100.442 143.161,100.784 143.161,101.041 ; 144.189,101.041 144.189,100.786 145.449,99.527 ; 144.189,101.67 144.189,103.036 145.444,104.29 ; 148.961,104.299 150.162,103.099 150.162,101.67 ; v1@149.82,100.442 150.162,100.784 150.162,101.041 ; 151.19,101.041 151.19,100.786 152.449,99.527 ; 151.19,101.67 151.19,103.036 152.445,104.29 ; 155.962,104.299 157.162,103.099 157.162,101.67 ; v1@156.82,100.442 157.162,100.784 157.162,101.041 ; 157.334,60.179 158.278,61.123 158.62,61.465 158.62,61.722 ; 157.42,64.98 158.62,63.779 158.62,62.351 ; 158.191,101.041 158.191,100.786 159.45,99.527 ; 158.191,101.67 158.191,103.036 159.446,104.29 ; 159.649,61.722 159.649,61.467 160.908,60.208 159.65,61.465 ; 159.649,62.351 159.649,63.716 160.903,64.971 ; 159.677,63.751 160.903,64.977 160.903,64.999 ; 162.963,104.299 164.163,103.099 164.163,101.67 ; v1@163.821,100.442 164.163,100.784 164.163,101.041 ; 164.335,60.179 165.279,61.123 165.621,61.465 165.621,61.722 ; 164.421,64.98 165.621,63.779 165.621,62.351 ; 165.192,101.041 165.192,100.786 166.451,99.527 ; 165.192,101.67 165.192,103.036 166.446,104.29 ; 166.649,61.722 166.649,61.467 167.908,60.208 166.651,61.465 ; 166.649,62.351 166.649,63.716 167.904,64.971 ; 166.678,63.751 167.904,64.977 167.904,64.999 ; 169.964,104.299 171.164,103.099 171.164,101.67 ; v1@170.822,100.442 171.164,100.784 171.164,101.041 ; 171.336,60.179 172.28,61.123 172.622,61.465 172.622,61.722 ; 171.421,64.98 172.622,63.779 172.622,62.351 ; 172.193,101.041 172.193,100.786 173.452,99.527 ; 172.193,101.67 172.193,103.036 173.447,104.29 ; 173.65,61.722 173.65,61.467 174.909,60.208 173.652,61.465 ; 173.65,62.351 173.65,63.716 174.905,64.971 ; 173.679,63.751 174.905,64.977 174.905,64.999 ; 176.965,104.299 178.165,103.099 178.165,101.67 ; v1@177.823,100.442 178.165,100.784 178.165,101.041 ; 178.337,60.179 179.28,61.123 179.622,61.465 179.622,61.722 ; 178.422,64.98 179.622,63.779 179.622,62.351 ; 179.194,101.041 179.194,100.786 180.453,99.527 ; 179.194,101.67 179.194,103.036 180.448,104.29 ; 180.651,61.722 180.651,61.467 181.91,60.208 180.653,61.465 ; 180.651,62.351 180.651,63.716 181.906,64.971 ; 180.68,63.751 181.906,64.977 181.906,64.999 ; 183.966,104.299 185.166,103.099 185.166,101.67 ; v1@184.824,100.442 185.166,100.784 185.166,101.041 ; 185.337,60.208 186.281,61.151 186.623,61.493 186.623,61.751 ; 185.423,65.008 186.623,63.808 186.623,62.379 ; 186.195,101.041 186.195,100.786 187.454,99.527 ; 186.195,101.67 186.195,103.036 187.449,104.29 ; 187.652,61.751 187.652,61.495 188.911,60.236 187.654,61.493 ; 187.652,62.379 187.652,63.745 188.906,64.999 ; 187.681,63.779 188.906,65.005 188.906,65.028 ; 199.854,104.299 201.054,103.099 201.054,101.67 ; v1@200.712,100.442 201.054,100.784 201.054,101.041 ; 202.082,101.041 202.082,100.786 203.341,99.527 ; 202.082,101.67 202.082,103.036 203.337,104.29 ; 206.854,104.299 208.055,103.099 208.055,101.67 ; v1@207.713,100.442 208.055,100.784 208.055,101.041 ; 209.083,101.041 209.083,100.786 210.342,99.527 ; 209.083,101.67 209.083,103.036 210.338,104.29
  other v1: 158.43,60.999 159.859,60.999 165.431,60.999 166.86,60.999 172.432,60.999 173.861,60.999 179.433,60.999 180.862,60.999 186.434,61.028 187.862,61.028 140.703,63.438 140.703,64.867 140.703,70.439 140.703,71.868 140.703,77.44 140.703,78.869 142.962,100.298 144.391,100.298 149.963,100.298 151.392,100.298 156.964,100.298 158.393,100.298 163.965,100.298 165.394,100.298 170.966,100.298 172.395,100.298 177.967,100.298 179.396,100.298 184.968,100.298 186.396,100.298 200.855,100.298 202.284,100.298 207.856,100.298 209.285,100.298

## Keep-outs
Keep-Out Layer:
  lines w0.254: 131.474,60.436 138.417,60.436 ccw(c138.417,61.779) 139.76,61.779 139.76,62.265 ; 131.474,67.437 138.417,67.437 ccw(c138.417,68.78) 139.76,68.78 139.76,69.266 ; 131.474,67.866 138.417,67.866 cw(c138.417,66.523) 139.76,66.523 139.76,66.037 ; 131.474,74.438 138.417,74.438 ccw(c138.417,75.781) 139.76,75.781 139.76,76.267 ; 131.474,74.867 138.417,74.867 cw(c138.417,73.523) 139.76,73.523 139.76,73.038 ; 131.474,81.867 138.417,81.867 cw(c138.417,80.524) 139.76,80.524 139.76,80.039 ; 131.502,60.436 cw(c131.488,60.679) 131.502,60.922 138.417,60.922 ccw(c138.417,61.779) 139.275,61.779 139.275,62.265 cw(c139.517,62.279) 139.76,62.265 ; 131.502,67.437 cw(c131.488,67.68) 131.502,67.923 138.417,67.923 ; 131.502,67.866 ccw(c131.488,67.623) 131.502,67.38 138.417,67.38 cw(c138.417,66.523) 139.275,66.523 139.275,66.037 ; 131.502,74.438 cw(c131.488,74.681) 131.502,74.924 138.417,74.924 ccw(c138.417,75.781) 139.275,75.781 139.275,76.267 ; 131.502,74.866 ccw(c131.488,74.624) 131.502,74.381 138.417,74.381 ; 131.502,81.867 ccw(c131.488,81.624) 131.502,81.382 138.417,81.382 cw(c138.417,80.524) 139.275,80.524 139.275,80.039 ccw(c139.517,80.024) 139.76,80.039 ; 138.417,67.923 ccw(c138.417,68.78) 139.275,68.78 139.275,69.266 cw(c139.517,69.28) 139.76,69.266 ; 138.417,74.381 cw(c138.417,73.523) 139.275,73.523 139.275,73.038 ccw(c139.517,73.023) 139.76,73.038 ; 139.275,66.037 ccw(c139.517,66.023) 139.76,66.037 ; 139.275,76.267 cw(c139.517,76.281) 139.76,76.267 ; 139.96,109.499 cw(c140.203,109.514) 140.446,109.499 ; 139.96,109.528 139.96,102.584 ccw(c141.303,102.584) 141.303,101.241 141.789,101.241 ccw(c141.803,101.484) 141.789,101.727 141.303,101.727 cw(c141.303,102.584) 140.446,102.584 140.446,109.499 ; 146.904,109.499 146.904,102.584 cw(c146.047,102.584) 146.047,101.727 145.561,101.727 ccw(c145.547,101.484) 145.561,101.241 146.047,101.241 ccw(c146.047,102.584) 147.39,102.584 147.39,109.528 ; 146.904,109.499 cw(c147.147,109.514) 147.39,109.499 ; 146.961,109.499 cw(c147.204,109.514) 147.447,109.499 147.447,102.584 ccw(c148.304,102.584) 148.304,101.727 148.79,101.727 cw(c148.804,101.484) 148.79,101.241 148.304,101.241 cw(c148.304,102.584) 146.961,102.584 146.961,109.528 ; 152.562,101.241 cw(c152.548,101.484) 152.562,101.727 ; 152.562,101.241 153.048,101.241 ccw(c153.048,102.584) 154.391,102.584 154.391,109.528 ; 152.562,101.727 153.048,101.727 ccw(c153.048,102.584) 153.905,102.584 153.905,109.499 cw(c154.148,109.514) 154.391,109.499 ; 153.962,109.499 cw(c154.205,109.514) 154.448,109.499 154.448,102.584 ; 153.962,109.528 153.962,102.584 ccw(c155.305,102.584) 155.305,101.241 155.791,101.241 ccw(c155.805,101.484) 155.791,101.727 155.305,101.727 cw(c155.305,102.584) 154.448,102.584 ; 155.448,63.208 155.448,66.694 cw(c156.791,66.694) 156.791,68.037 157.277,68.037 cw(c157.291,67.794) 157.277,67.551 156.791,67.551 ccw(c156.791,66.694) 155.934,66.694 ; 155.448,63.294 ccw(c156.791,63.294) 156.791,61.951 157.277,61.951 ccw(c157.291,62.193) 157.277,62.436 156.791,62.436 ; 155.934,63.208 155.934,66.694 ; 155.934,63.294 ccw(c156.791,63.294) 156.791,62.436 ; 160.906,102.584 cw(c160.049,102.584) 160.049,101.727 159.563,101.727 ccw(c159.549,101.484) 159.563,101.241 160.049,101.241 ccw(c160.049,102.584) 161.392,102.584 161.392,109.528 ; 160.906,102.584 160.906,109.499 cw(c161.149,109.514) 161.392,109.499 ; 160.963,109.528 160.963,102.584 ccw(c162.306,102.584) 162.306,101.241 162.792,101.241 ; 160.963,109.499 cw(c161.206,109.514) 161.449,109.499 161.449,102.584 ccw(c162.306,102.584) 162.306,101.727 162.792,101.727 ; 161.534,62.436 161.049,62.436 ccw(c161.034,62.193) 161.049,61.951 161.534,61.951 ccw(c161.534,63.294) 162.877,63.294 162.877,66.694 ccw(c161.534,66.694) 161.534,68.037 161.049,68.037 ccw(c161.034,67.794) 161.049,67.551 161.534,67.551 cw(c161.534,66.694) 162.392,66.694 ; 161.534,62.436 ccw(c161.534,63.294) 162.392,63.294 ; 162.392,63.294 162.392,66.665 ; 162.449,63.208 162.449,66.694 cw(c163.792,66.694) 163.792,68.037 164.278,68.037 ; 162.449,63.294 ccw(c163.792,63.294) 163.792,61.951 164.278,61.951 ; 162.792,101.241 ccw(c162.806,101.484) 162.792,101.727 ; 162.935,63.208 162.935,66.694 cw(c163.792,66.694) 163.792,67.551 164.278,67.551 ; 162.935,63.294 ccw(c163.792,63.294) 163.792,62.436 ; 163.792,62.436 164.278,62.436 ; 164.278,61.951 ccw(c164.292,62.193) 164.278,62.436 ; 164.278,67.551 ccw(c164.292,67.794) 164.278,68.037 ; 167.964,109.499 cw(c168.207,109.514) 168.45,109.499 ; 167.964,109.528 167.964,102.584 ccw(c169.307,102.584) 169.307,101.241 169.793,101.241 ccw(c169.807,101.484) 169.793,101.727 169.307,101.727 cw(c169.307,102.584) 168.45,102.584 168.45,109.499 ; 168.392,109.499 ccw(c168.15,109.514) 167.907,109.499 167.907,102.584 cw(c167.049,102.584) 167.049,101.727 166.564,101.727 ccw(c166.549,101.484) 166.564,101.241 167.049,101.241 ccw(c167.049,102.584) 168.392,102.584 168.392,109.528 ; 168.535,62.436 168.05,62.436 ccw(c168.035,62.193) 168.05,61.951 168.535,61.951 ccw(c168.535,63.294) 169.878,63.294 169.878,66.694 ccw(c168.535,66.694) 168.535,68.037 168.05,68.037 ccw(c168.035,67.794) 168.05,67.551 168.535,67.551 cw(c168.535,66.694) 169.393,66.694 ; 168.535,62.436 ccw(c168.535,63.294) 169.393,63.294 169.393,66.665 ; 169.45,63.208 169.45,66.694 cw(c170.793,66.694) 170.793,68.037 171.279,68.037 cw(c171.293,67.794) 171.279,67.551 170.793,67.551 ccw(c170.793,66.694) 169.936,66.694 169.936,63.208 ; 169.45,63.294 ccw(c170.793,63.294) 170.793,61.951 171.279,61.951 ccw(c171.293,62.193) 171.279,62.436 170.793,62.436 ; 169.936,63.294 ccw(c170.793,63.294) 170.793,62.436 ; 174.908,109.499 174.908,102.584 cw(c174.05,102.584) 174.05,101.727 173.565,101.727 ccw(c173.55,101.484) 173.565,101.241 174.05,101.241 ccw(c174.05,102.584) 175.393,102.584 175.393,109.528 ; 174.908,109.499 cw(c175.15,109.514) 175.393,109.499 ; 174.965,109.499 cw(c175.208,109.514) 175.45,109.499 175.451,102.584 ccw(c176.308,102.584) 176.308,101.727 176.794,101.727 cw(c176.808,101.484) 176.794,101.241 176.308,101.241 cw(c176.308,102.584) 174.965,102.584 174.965,109.528 ; 175.536,62.436 175.05,62.436 ccw(c175.036,62.193) 175.05,61.951 175.536,61.951 ccw(c175.536,63.294) 176.879,63.294 176.879,66.694 ccw(c175.536,66.694) 175.536,68.037 175.05,68.037 ccw(c175.036,67.794) 175.05,67.551 175.536,67.551 cw(c175.536,66.694) 176.393,66.694 ; 175.536,62.436 ccw(c175.536,63.294) 176.393,63.294 176.393,66.665 ; 176.451,63.208 176.451,66.694 cw(c177.794,66.694) 177.794,68.037 178.279,68.037 cw(c178.294,67.794) 178.279,67.551 177.794,67.551 ccw(c177.794,66.694) 176.936,66.694 176.936,63.208 ; 176.451,63.294 ccw(c177.794,63.294) 177.794,61.951 178.279,61.951 ccw(c178.294,62.193) 178.279,62.436 177.794,62.436 ; 176.936,63.294 ccw(c177.794,63.294) 177.794,62.436 ; 180.565,101.241 cw(c180.551,101.484) 180.565,101.727 ; 180.565,101.241 181.051,101.241 ccw(c181.051,102.584) 182.394,102.584 182.394,109.528 ; 180.565,101.727 181.051,101.727 ccw(c181.051,102.584) 181.908,102.584 181.908,109.499 cw(c182.151,109.514) 182.394,109.499 ; 181.966,109.499 cw(c182.208,109.514) 182.451,109.499 182.451,102.584 ; 181.966,109.528 181.966,102.584 ccw(c183.309,102.584) 183.309,101.241 183.794,101.241 ccw(c183.809,101.484) 183.794,101.727 183.309,101.727 cw(c183.309,102.584) 182.451,102.584 ; 182.051,61.951 cw(c182.037,62.193) 182.051,62.436 ; 182.051,67.551 cw(c182.037,67.794) 182.051,68.037 ; 182.051,61.951 182.537,61.951 ccw(c182.537,63.294) 183.88,63.294 183.88,66.694 ccw(c182.537,66.694) 182.537,68.037 182.051,68.037 ; 182.051,62.436 182.537,62.436 ; 182.051,67.551 182.537,67.551 cw(c182.537,66.694) 183.394,66.694 ; 182.537,62.436 ccw(c182.537,63.294) 183.394,63.294 183.394,66.665 ; 183.451,63.236 183.451,66.723 cw(c184.795,66.723) 184.795,68.066 185.28,68.066 cw(c185.295,67.823) 185.28,67.58 ; 183.451,63.322 ccw(c184.795,63.322) 184.795,61.979 185.28,61.979 ; 183.937,63.236 183.937,66.723 ; 183.937,63.322 ccw(c184.795,63.322) 184.795,62.465 185.28,62.465 cw(c185.295,62.222) 185.28,61.979 ; 183.937,66.723 cw(c184.795,66.723) 184.795,67.58 185.28,67.58 ; 188.909,102.584 cw(c188.052,102.584) 188.052,101.727 187.566,101.727 ccw(c187.552,101.484) 187.566,101.241 188.052,101.241 ccw(c188.052,102.584) 189.395,102.584 189.395,109.528 ; 188.909,102.584 188.909,109.499 cw(c189.152,109.514) 189.395,109.499 ; 189.052,61.979 189.538,61.979 ccw(c189.538,63.322) 190.881,63.322 190.881,66.723 ccw(c189.538,66.723) 189.538,68.066 189.052,68.066 ccw(c189.038,67.823) 189.052,67.58 ; 189.052,61.979 cw(c189.038,62.222) 189.052,62.465 189.538,62.465 ccw(c189.538,63.322) 190.395,63.322 ; 189.052,67.58 189.538,67.58 cw(c189.538,66.723) 190.395,66.723 ; 190.395,63.322 190.395,66.694 ; 197.853,109.499 cw(c198.096,109.514) 198.339,109.499 198.339,102.584 ; 197.853,109.528 197.853,102.584 ccw(c199.196,102.584) 199.196,101.241 199.682,101.241 ccw(c199.696,101.484) 199.682,101.727 199.196,101.727 cw(c199.196,102.584) 198.339,102.584 ; 204.797,102.584 cw(c203.94,102.584) 203.94,101.727 203.454,101.727 ccw(c203.44,101.484) 203.454,101.241 203.94,101.241 ccw(c203.94,102.584) 205.283,102.584 205.283,109.528 ; 204.797,102.584 204.797,109.499 cw(c205.04,109.514) 205.283,109.499 ; 204.854,109.528 204.854,102.584 ccw(c206.197,102.584) 206.197,101.241 206.683,101.241 ; 204.854,109.499 cw(c205.097,109.514) 205.34,109.499 205.34,102.584 ccw(c206.197,102.584) 206.197,101.727 206.683,101.727 ; 206.683,101.241 ccw(c206.697,101.484) 206.683,101.727 ; 212.284,109.499 ccw(c212.041,109.514) 211.798,109.499 211.798,102.584 cw(c210.941,102.584) 210.941,101.727 210.455,101.727 ccw(c210.441,101.484) 210.455,101.241 210.941,101.241 ccw(c210.941,102.584) 212.284,102.584 212.284,109.528 ; 218.851,50.201 ccw(c218.851,54.03) 222.679,54.03 ; 218.913,50.207 135.217,50.207 cw(c135.217,54.707) 130.717,54.707 130.717,85.057 132.117,86.457 132.117,106.707 cw(c135.617,106.707) 135.617,110.207 226.217,110.207 cw(c226.217,105.707) 230.717,105.707 ; 222.685,54.007 222.685,68.437 230.715,76.467 230.715,105.727

## Silkscreen, mask and mechanical layers (free items; w line width, h text height)
Top Overlay:
  lines w0.254: 133.231,65.637 135.031,65.637 ; 133.26,79.781 135.06,79.781 ; 133.274,72.723 135.074,72.723 ; 133.631,65.237 134.631,65.237 ; 133.66,79.381 134.66,79.381 ; 133.674,72.323 134.674,72.323 ; 133.931,64.837 134.331,64.837 ; 133.96,78.981 134.36,78.981 ; 133.974,71.923 134.374,71.923 ; 134.131,65.637 134.131,66.937 ; 134.16,79.781 134.16,81.081 ; 134.174,72.723 134.174,74.023 ; 144.461,107.013 146.261,107.013 ; 144.861,106.613 145.861,106.613 ; 145.161,106.213 145.561,106.213 ; 145.361,107.013 145.361,108.313 ; 160.906,57.064 160.906,58.836 ; 165.492,107.128 167.292,107.128 ; 165.892,106.728 166.892,106.728 ; 166.192,106.328 166.592,106.328 ; 166.392,107.128 166.392,108.428 ; 167.935,56.95 167.935,58.722 ; 170.464,57.379 172.264,57.379 ; 170.864,56.979 171.864,56.979 ; 171.164,56.579 171.564,56.579 ; 171.364,57.379 171.364,58.679 ; 174.936,57.064 174.936,58.836 ; 177.465,57.379 179.265,57.379 ; 177.865,56.979 178.865,56.979 ; 178.165,56.579 178.565,56.579 ; 178.365,57.379 178.365,58.679 ; 184.437,57.222 185.337,58.122 186.237,57.222 ; 186.438,106.928 188.238,106.928 ; 186.838,106.528 187.838,106.528 ; 187.138,106.128 187.538,106.128 ; 187.338,106.928 187.338,108.228 ; 188.009,58.15 188.909,57.25 ; 188.909,58.722 188.909,57.25 ; 189.809,58.15 188.909,57.25 ; 202.297,106.928 204.097,106.928 ; 202.697,106.528 203.697,106.528 ; 202.997,106.128 203.397,106.128 ; 203.197,106.928 203.197,108.228 ; 206.104,106.663 206.797,105.971 206.797,107.099 ; 206.797,105.971 207.519,106.692 ; 209.591,106.363 210.312,107.085 ; 210.312,105.956 210.312,107.085 ; 211.005,106.392 210.312,107.085
  text "3.3V" at 199.111,109.757 h2.03 r270
  text "RX" at 206.026,109.642 h1.52 r270
  text "TX" at 209.54,109.642 h1.52 r270
  text "3.3V" at 162.192,109.414 h2.03 r270
  text "A3" at 158.391,108.871 h1.52 r270
  text "A0" at 148.104,108.728 h1.52 r270
  text "A7" at 179.565,108.728 h1.52 r270
  text "5V" at 141.132,108.699 h1.52 r270
  text "5V" at 183.051,108.699 h1.52 r270
  text "A6" at 176.108,108.671 h1.52 r270
  text "A2" at 155.077,108.642 h1.52 r270
  text "A5" at 172.593,108.614 h1.52 r270
  text "A4" at 169.164,108.585 h1.52 r270
  text "A1" at 151.648,108.471 h1.52 r270
  text "MOT" at 131.245,80.153 h1.52 r270
  text "SEP" at 131.274,73.581 h1.52 r270
  text "MAIN" at 131.302,66.78 h1.52 r270
  text "5V" at 180.651,57.207 h1.52
  text "CS" at 155.791,56.95 h1.52
  text "MISO" at 161.592,56.95 h1.52
  text "3.3V" at 172.136,55.064 h1.52
  text "RX" at 184.109,55.064 h1.52
  text "TX" at 187.423,54.778 h1.52
  text "SCK" at 158.648,54.75 h1.52
  text "MOSI" at 165.021,54.75 h1.52
  text "AVIONICS / V2.X Proto Hat" at 186.28,50.978 h1.75
Bottom Overlay:
  drawing of 4 lines, arcs and shapes, not listed
  text "github.com/byui-rocket-dynamics / BYU-Idaho Rocket Dynamics / Designed By Kace Chandler" at 190.195,53.55 h1.75
  text "JLCJLCJLCJLC" at 183.994,51.149 h1.75